# EAGLE board main (EAGLE 8.3.2)
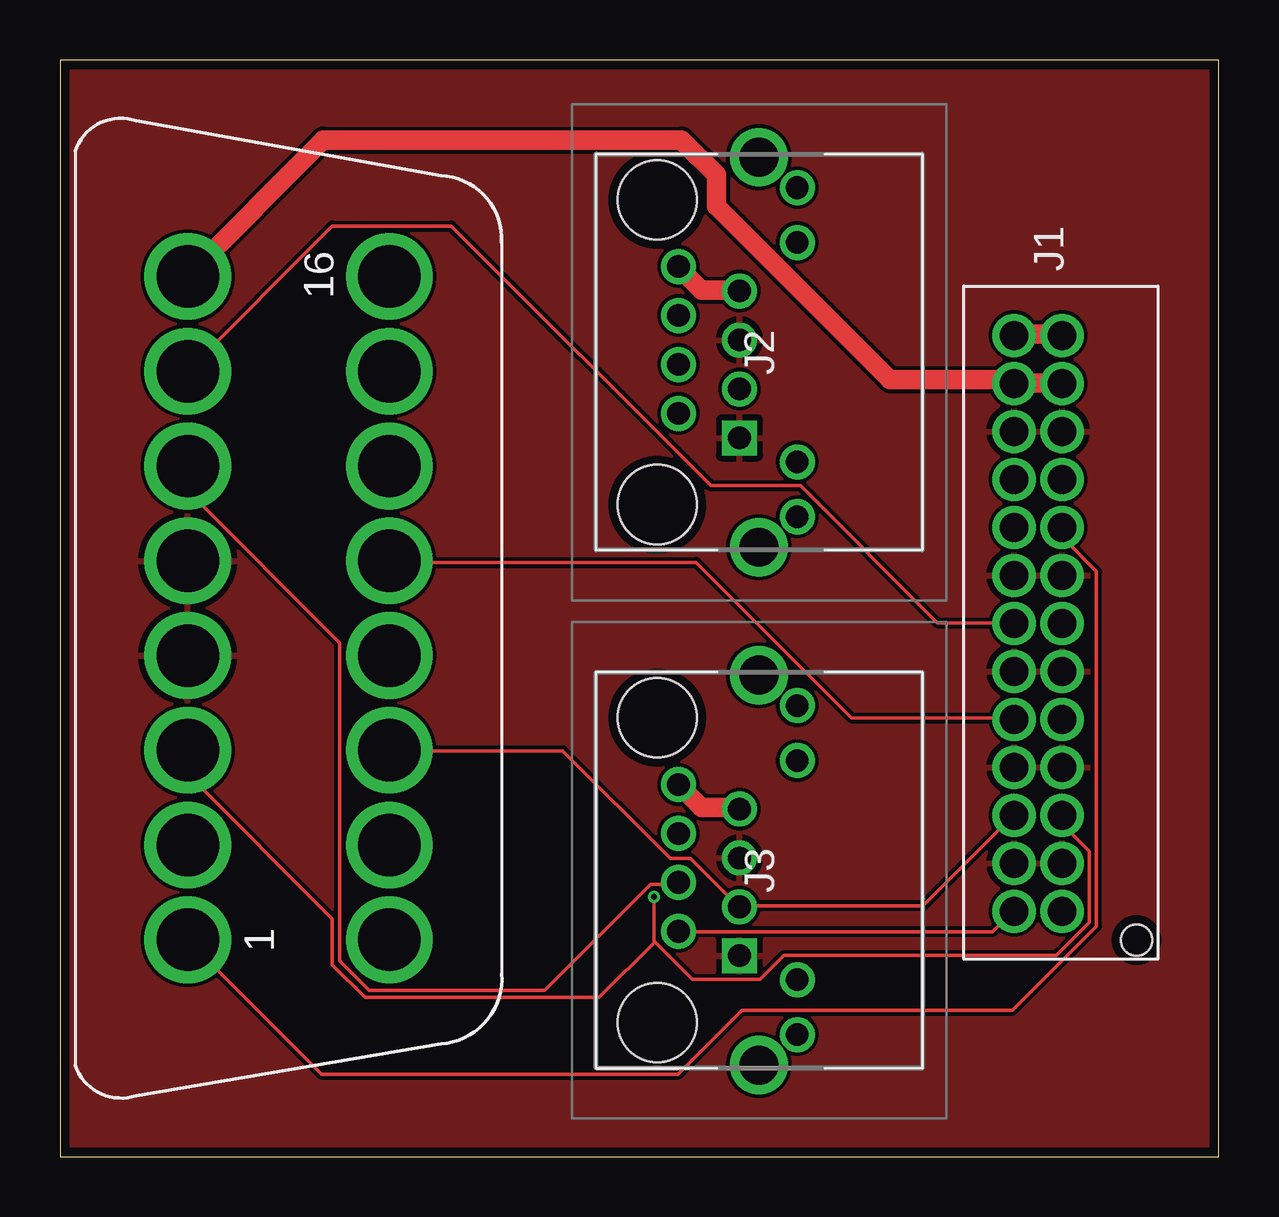
[diagram p0: board, top side]
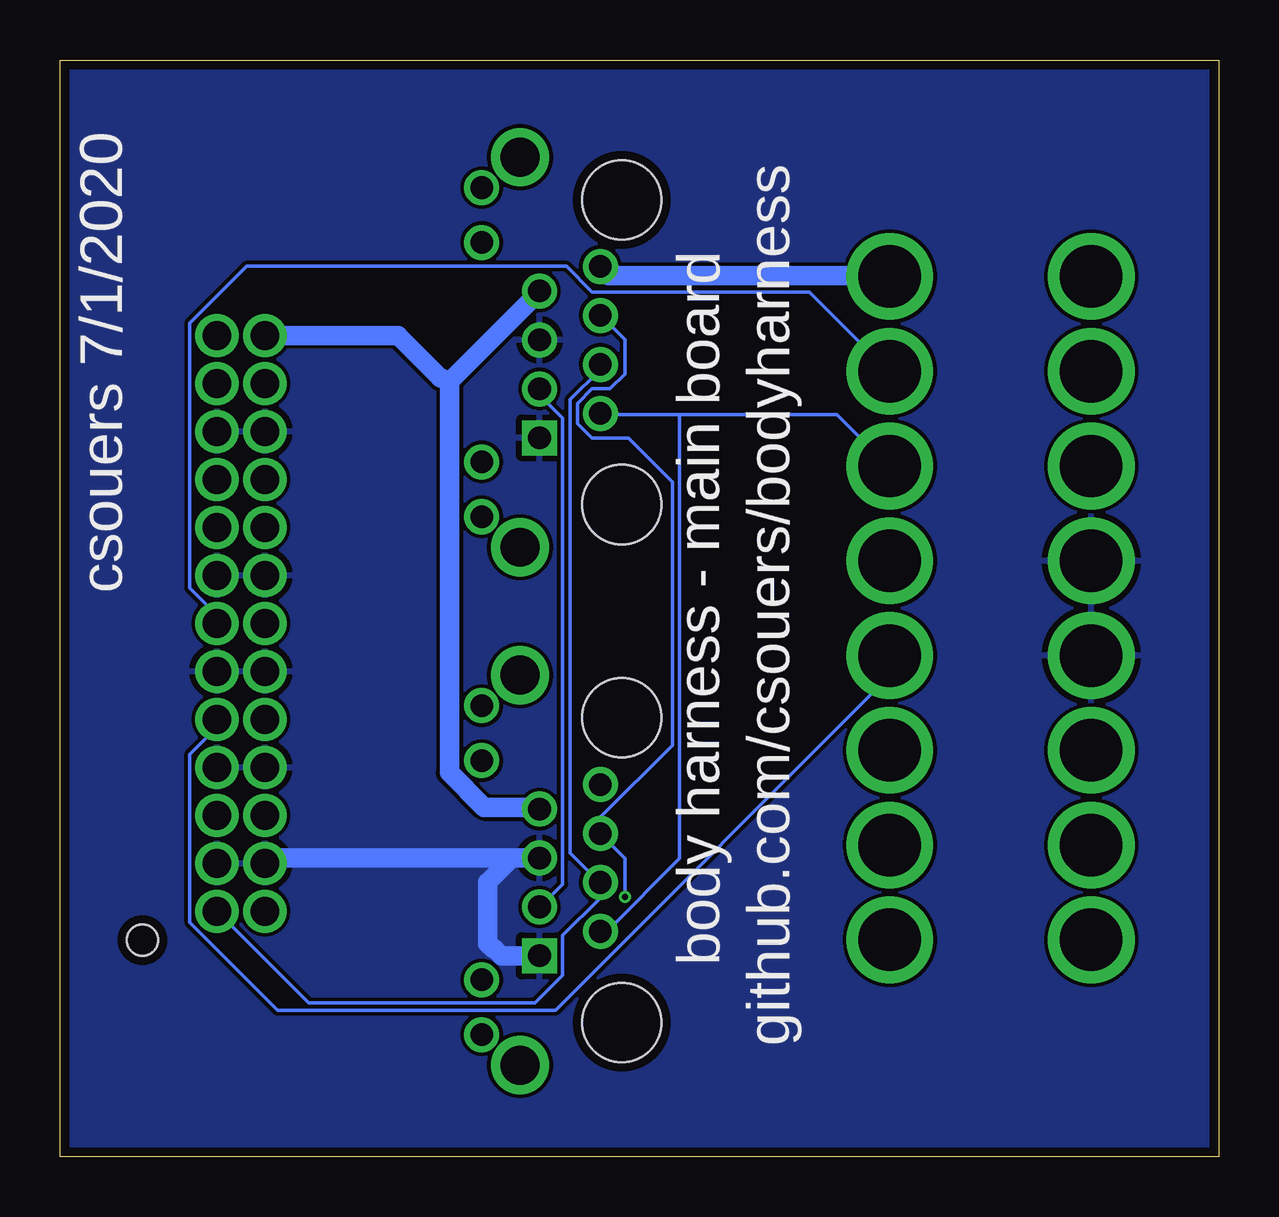
[diagram p1: board, bottom side, seen from below]

Size 48.31 x 45.71 mm. Coordinates in mm from the lower left corner, seen from the top.
Outline: 0,0 48.31,0 48.31,45.71 0,45.71 0,0
Copper layers (1*16): Top 0.035559375mm / dielectric 1.6mm / Bottom 0.035559375mm
Design rules "oshpark-2layer": minimum track width 6mil, minimum drill 10mil, track to track 6mil, track to pad 6mil, pad to pad 6mil, via to via 6mil, smd to smd 6mil, copper to edge 15mil, drill to drill 6mil, minimum pad ring 5mil, minimum via ring 5mil, stop-mask expansion 2.5mil, vias tented up to drill 0mil, thermal gap 10mil
Net classes: 1 PWR: width 0.813 mm, clearance 0.127 mm

## Footprints (pad centres in the part's own frame; a part is rotated, then mirrored left to right if it is on the bottom)
501645-2620 = drill 1.2: 1 -20,1; 2 -20,-1; 3 -18,1; 4 -18,-1; 5 -16,1; 6 -16,-1; 7 -14,1; 8 -14,-1; 9 -12,1; 10 -12,-1; 11 -10,1; 12 -10,-1; 13 -8,1; 14 -8,-1; 15 -6,1; 16 -6,-1; 17 -4,1; 18 -4,-1; 19 -2,1; 20 -2,-1; 21 0,1; 22 0,-1; 23 2,1; 24 2,-1; 25 4,1; 26 4,-1 | hole 1.3: -21.2,-4.1
RJHSE3384 = drill 0.94 pad 1.462 square: 1 3.57,5.97 | drill 0.94 pad 1.462: 2 2.55,3.43; 3 1.53,5.97; 4 0.51,3.43; 5 -0.51,5.97; 6 -1.53,3.43; 7 -2.55,5.97; 8 -3.57,3.43; 9 6.86,8.38; 10 4.57,8.38; 11 -4.57,8.38; 12 -6.86,8.38 | drill 1.62 pad 2.43: MH1 -8.13,6.78; MH2 8.13,6.78 | hole 3.3: -6.35,2.54; 6.35,2.54
OBDII-FEMALE = drill 2.6 pad 3.4: 1 13.825,-4.2; 2 9.875,-4.2; 3 5.925,-4.2; 4 1.975,-4.2; 5 -1.975,-4.2; 6 -5.925,-4.2; 7 -9.875,-4.2; 8 -13.825,-4.2; 9 13.825,4.2; 10 9.875,4.2; 11 5.925,4.2; 12 1.975,4.2; 13 -1.975,4.2; 14 -5.925,4.2; 15 -9.875,4.2; 16 -13.825,4.2

## Placement (x,y rotation side)
J1  501645-2620  [501645-2620]  40.77,30.23 90 top
J2  RJHSE-3380  [RJHSE3384]  22.35,33.53 270 top
J3  RJHSE-3380  [RJHSE3384]  22.35,11.94 270 top
PANDA  OBDII-FEMALEFEMALE  [OBDII-FEMALE]  9.53,22.86 270 top

## Library data of the parts
J1 = Souers
J2 J3 = RJHSE-3380; DESCRIPTION: AMPHENOL ICC - RJHSE-3380 - Modular Connector, RJ45 Jack, 1 x 1 Port, 8P8C, Cat5, Through Hole Mount; HEIGHT: 16.26mm; MANUFACTURER_NAME: Amphenol; MANUFACTURER_PART_NUMBER: RJHSE-3380; MOUSER2_PART_NUMBER: 523-RJHSE-3380; MOUSER2_PRICE-STOCK: https://www.mouser.com/Search/Refine.aspx?Keyword=523-RJHSE-3380
PANDA = comma.ai

## Nets
AUX2: J1.17
AUX3: J1.20
AUX4: J1.19
CAN0_H: J1.2 J2.4 J3.4 PANDA.6
CAN0_L: J1.1 J2.2 J3.2 PANDA.14
CAN1_H: J1.6 J2.6 J3.6 PANDA.3
CAN1_L: J1.5 J2.3 J3.3 PANDA.11
CAN2_H: J1.10 PANDA.12
CAN2_L: J1.9 PANDA.13
GMLAN: J1.18 PANDA.1
GND [PWR]: J1.3 J1.4 J1.7 J1.8 J1.11 J1.12 J1.15 J1.16 J1.21 J1.22 J2.1 J2.5 J3.1 J3.5 PANDA.4 PANDA.5
IGN [PWR]: J1.23 J1.24 PANDA.8
K_LINE: J1.13 PANDA.7
L_LINE: J1.14 PANDA.15
VIN [PWR]: J1.25 J1.26 J2.7 J2.8 J3.7 J3.8 PANDA.16

## Tracks (layer width: path | path; a pad name or v marks a point on that pad's centre or on a via)
CAN0_H
  Top 0.152: PANDA.6 5.33,28.73 5.33,27.74 11.66,21.41 11.66,8.15 12.88,6.93 20.19,6.93 24.61,11.35 25.76,11.35 J3.4
  Bottom 0.152: J1.2 41.76,10.21 37.95,6.4 28.5,6.4 27.36,7.54 27.36,9.22 25.83,10.74 25.83,11.35 J3.4 25.83,11.43 27.05,12.65 27.05,31.55 25.83,32.77 25.83,32.99 J2.4
CAN0_L
  Top 0.152: J3.2 25.83,9.37 38.86,9.37 39.7,10.21 J1.1
  Bottom 0.152: 22.48,30.94 15.93,30.94 13.79,28.8 PANDA.14 | 22.48,30.94 25.76,30.94 J2.2 | 22.48,30.94 22.48,12.42 25.45,9.45 25.76,9.45 J3.2
CAN1_H  (via drill 0.25)
  Top 0.152: 24.8,8.95 24.77,8.99 v24.77,10.82 | 24.8,8.95 26.36,7.39 29.18,7.39 30.18,8.38 41.53,8.38 42.9,9.75 42.9,12.72 41.83,13.79 41.83,14.17 J1.6 | 24.8,8.95 22.48,6.63 12.72,6.63 11.35,8 11.35,9.91 5.33,15.93 5.33,16.92 PANDA.3
  Bottom 0.152: J2.6 25.76,35.05 24.77,34.06 24.77,32.61 25.38,32 26.14,32 26.75,31.39 26.75,30.56 26.14,29.95 24.61,29.95 22.78,28.12 22.78,17.14 25.76,14.17 25.76,13.49 J3.6 25.76,13.41 24.77,12.42 v24.77,10.82
CAN1_L
  Top 0.152: J1.5 39.7,14.17 35.97,10.44 28.35,10.44 J3.3 28.27,10.44 26.29,12.42 25.45,12.42 20.95,16.92 13.79,16.92 PANDA.11
  Bottom 0.152: J2.3 28.27,31.93 28.27,31.7 27.36,30.79 27.36,11.35 28.27,10.44 J3.3
CAN2_H
  Bottom 0.152: J1.10 41.83,18.21 41.83,17.83 42.9,16.76 42.9,9.75 39.24,6.1 27.66,6.1 13.79,19.96 13.79,20.88 PANDA.12
CAN2_L
  Top 0.152: J1.9 39.7,18.29 32.99,18.29 26.52,24.77 13.79,24.77 PANDA.13
GMLAN
  Top 0.152: J1.18 41.83,26.21 41.83,25.76 43.2,24.38 43.2,9.6 39.7,6.1 28.42,6.1 25.76,3.43 10.9,3.43 5.33,8.99 PANDA.1
GND
  Bottom 0.813: J3.1 29.91,8.37 30.2,8.66 30.25,8.66 30.48,8.89 30.48,11.43 29.46,12.45 J3.5 39.55,12.45 J1.3
  pour Bottom: 0,45.72 48.26,45.72 48.26,0 0,0
  pour Top: 0,45.72 48.26,45.72 48.26,0 0,0
IGN
  Top 0.813: J1.24 41.76,32.23 J1.23 39.4,32.38 34.59,32.38 27.36,39.62 27.36,40.92 25.91,42.37 10.97,42.37 5.33,36.73 PANDA.8
K_LINE
  Top 0.152: J1.13 39.7,22.25 36.58,22.25 30.86,27.96 27.13,27.96 16.31,38.79 11.35,38.79 5.33,32.77 PANDA.7
L_LINE
  Bottom 0.152: J1.14 41.83,22.25 41.83,22.63 42.9,23.7 42.9,34.75 40.54,37.11 27.2,37.11 26.14,36.04 17.07,36.04 13.79,32.77 PANDA.15
VIN
  Top 0.813: J1.25 39.78,34.29 41.76,34.29 J1.26 | J3.7 28.27,14.55 26.75,14.55 25.83,15.47 J3.8 | J2.7 28.27,36.12 26.75,36.12 25.83,37.03 J2.8
  Bottom 0.813: 32.08,32.31 32.08,16 30.63,14.55 28.35,14.55 J3.7 | 32.08,32.31 28.35,36.04 J2.7 | J1.25 39.7,34.21 34.21,34.21 32.46,32.46 32.08,32.31 | PANDA.16 13.79,36.73 25.45,36.73 25.76,37.03 J2.8

## Text on the board
bPlace: github.com/csouers/bodyharness | body harness - main board | csouers 7/1/2020